# Altium PCB isp.PcbDoc
Units mil, origin at the board's own origin, x right, y up, seen from the top; angles counter-clockwise.
Board outline 1400 x 650 mil, 6 copper layers (Top, 2-GND, 3-SIG, 4-SIG, 5-GND, Bottom), stack 46.142 mil thick; 58 components, 58 nets, 288 pads, 146 vias.
Unrouted connection lines stored in the file: 4.
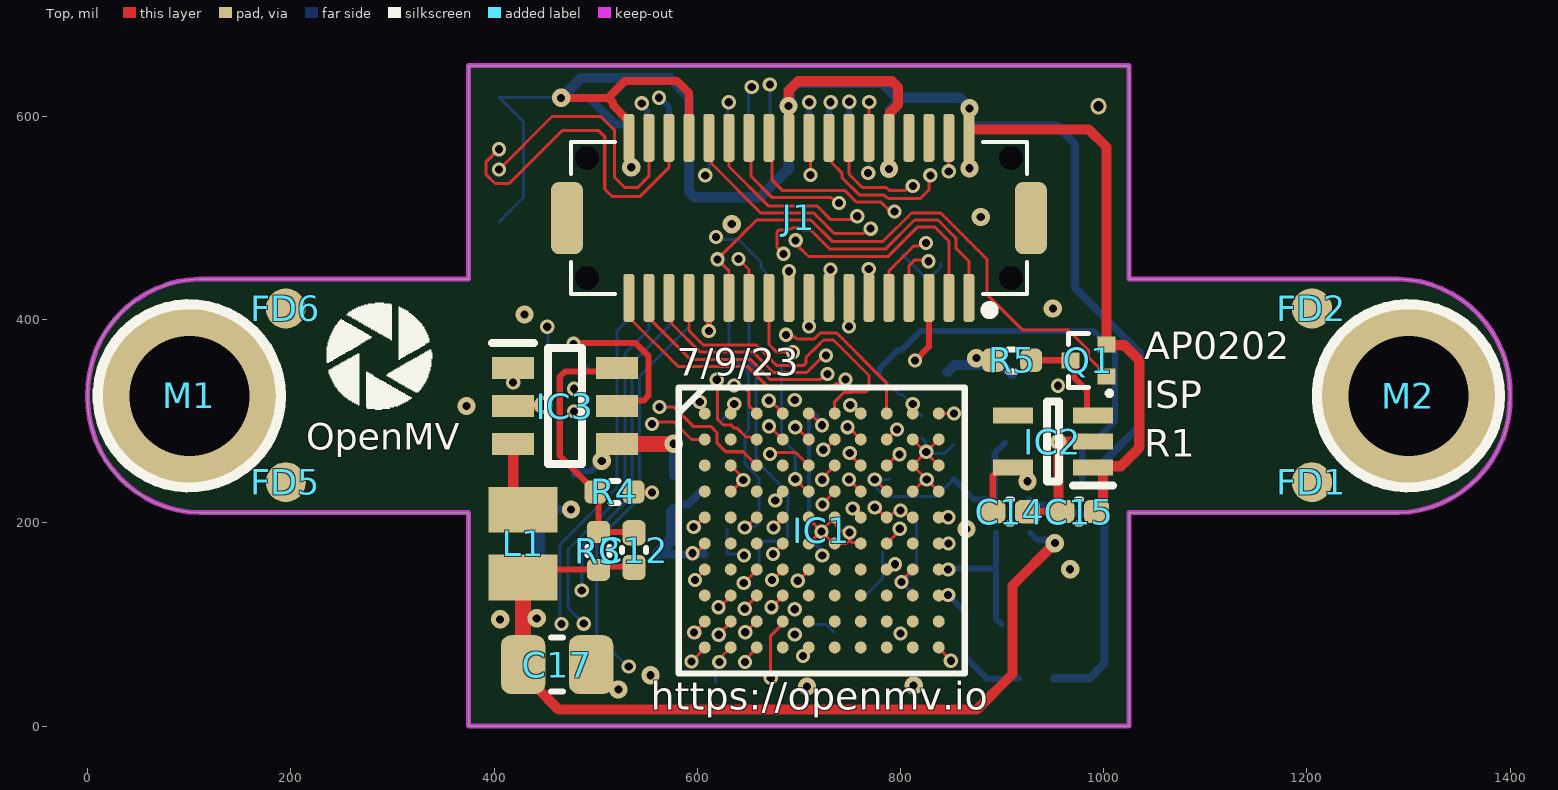
[diagram p0: Top view]
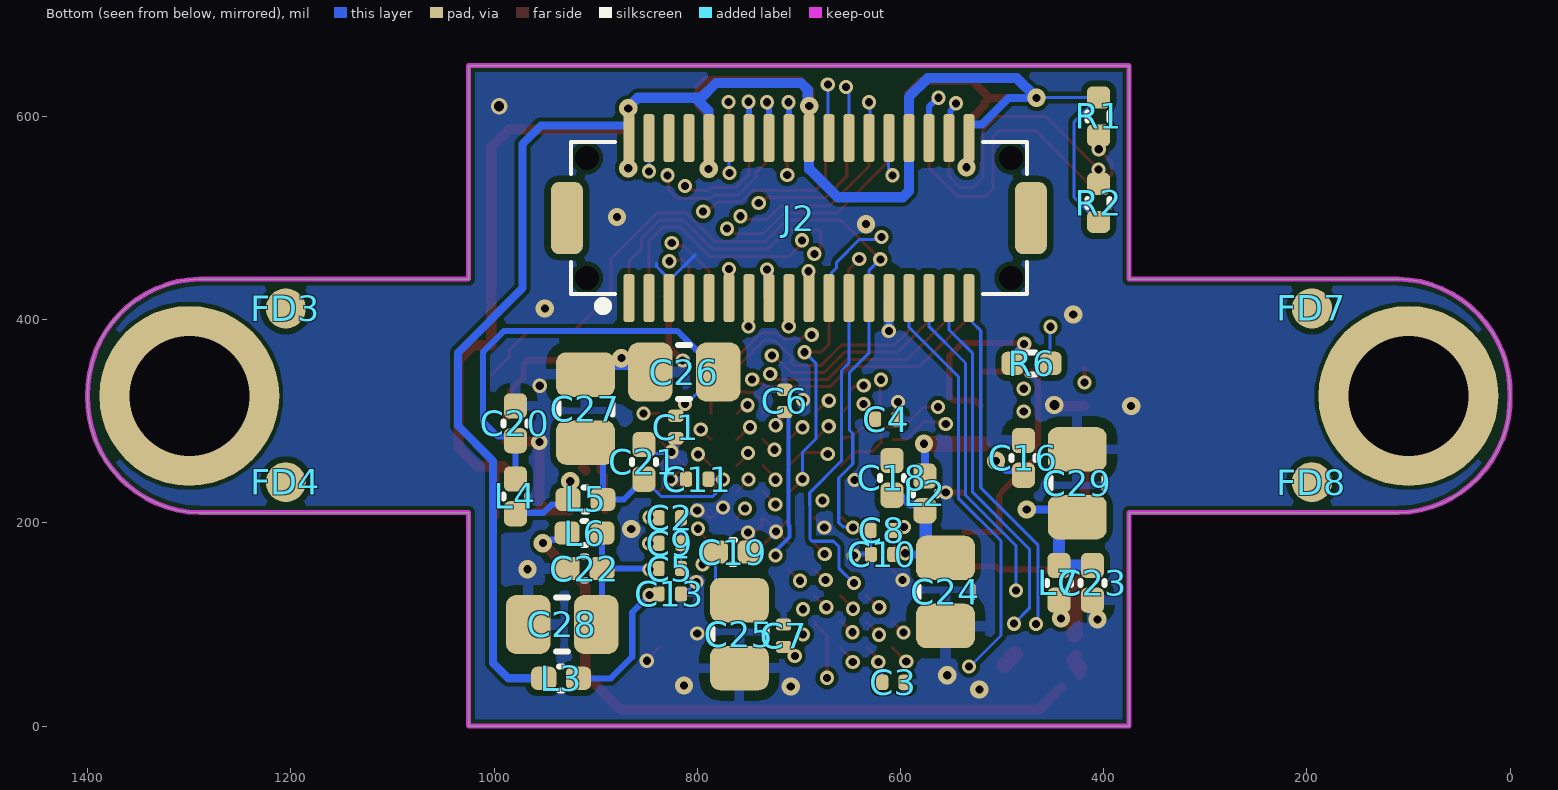
[diagram p1: Bottom view, seen from below]
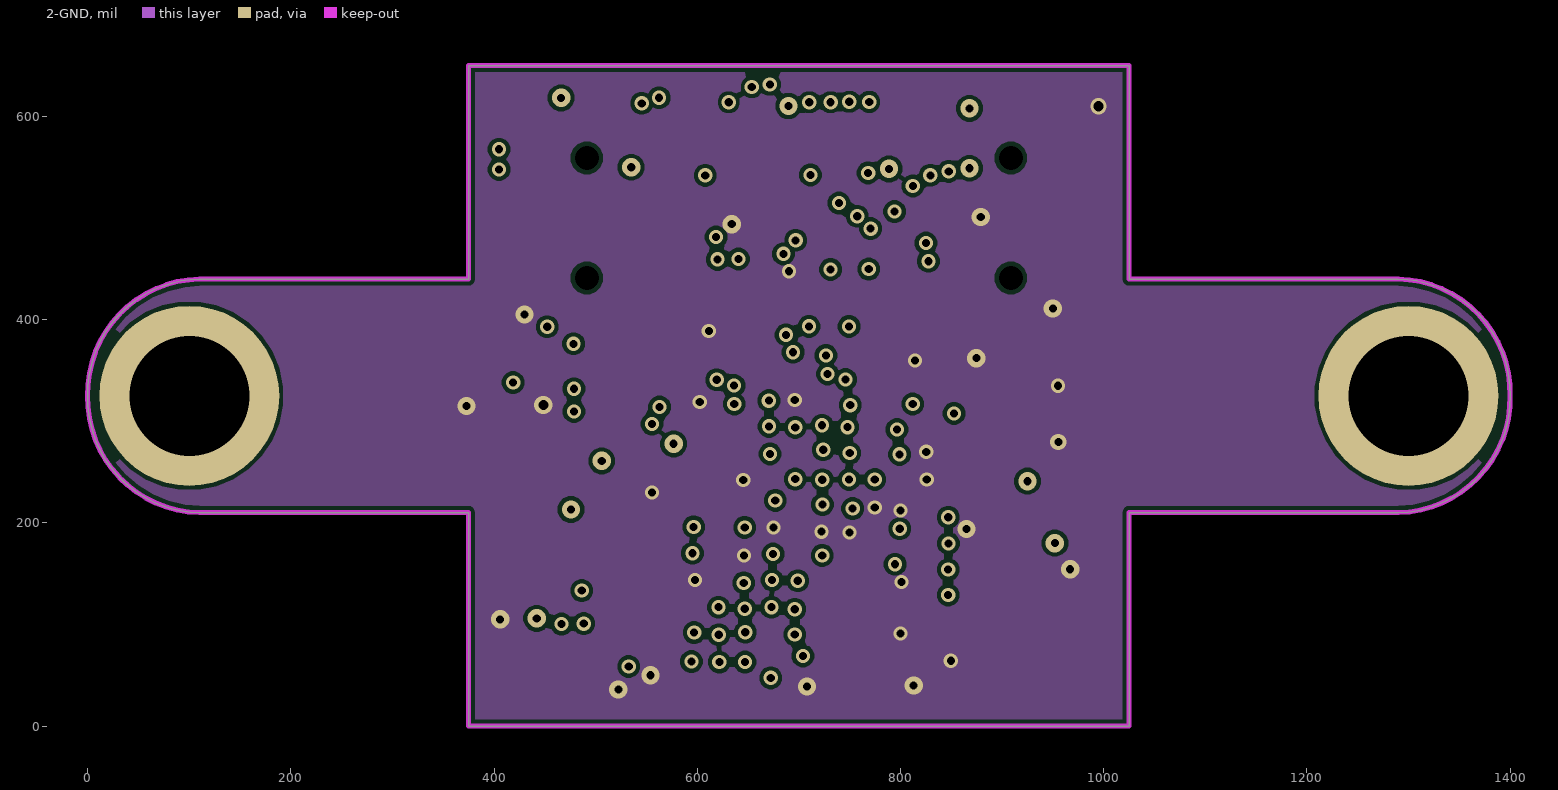
[diagram p2: 2-GND]
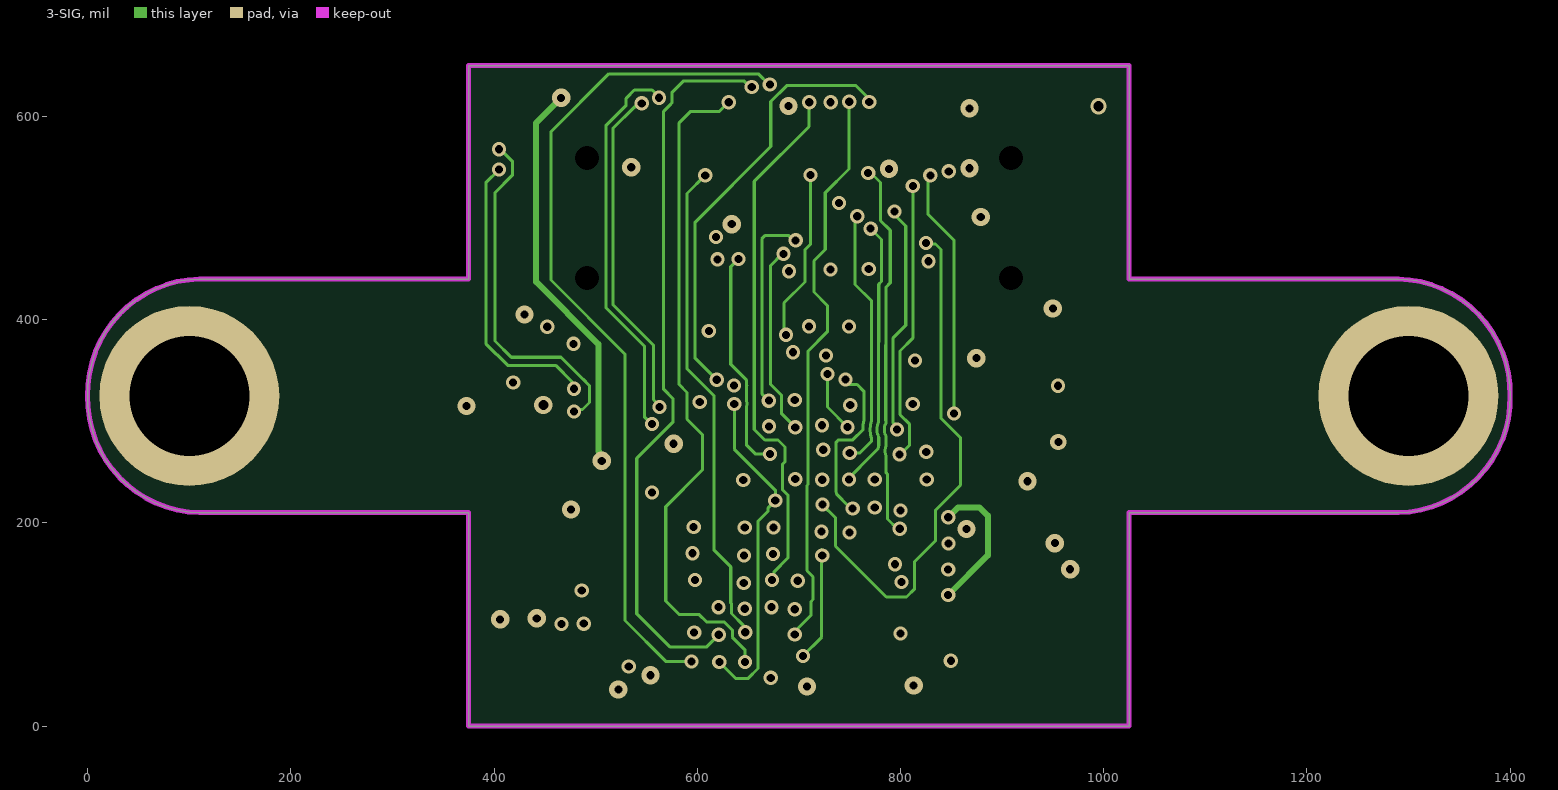
[diagram p3: 3-SIG]
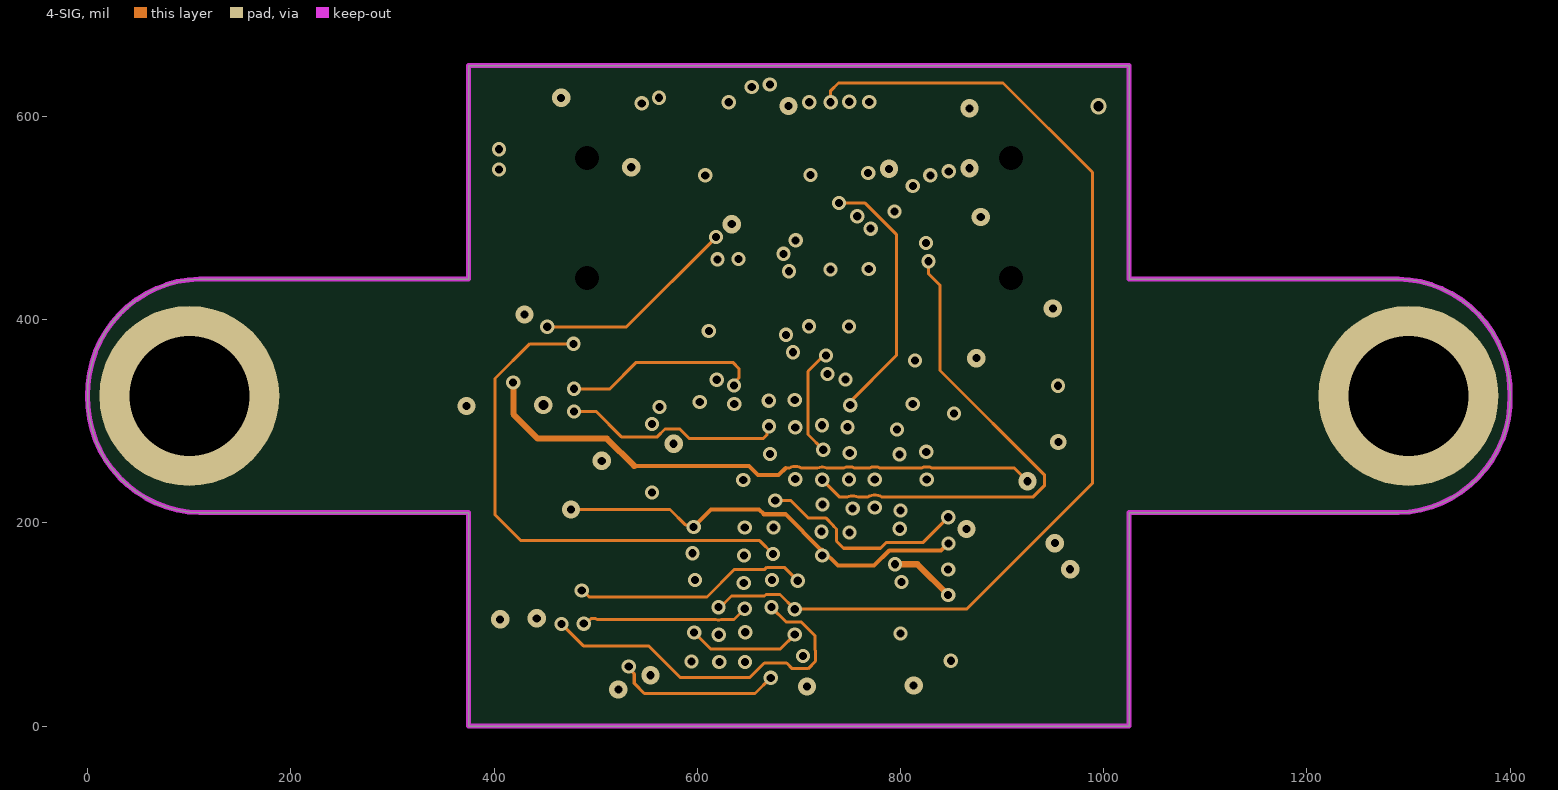
[diagram p4: 4-SIG]
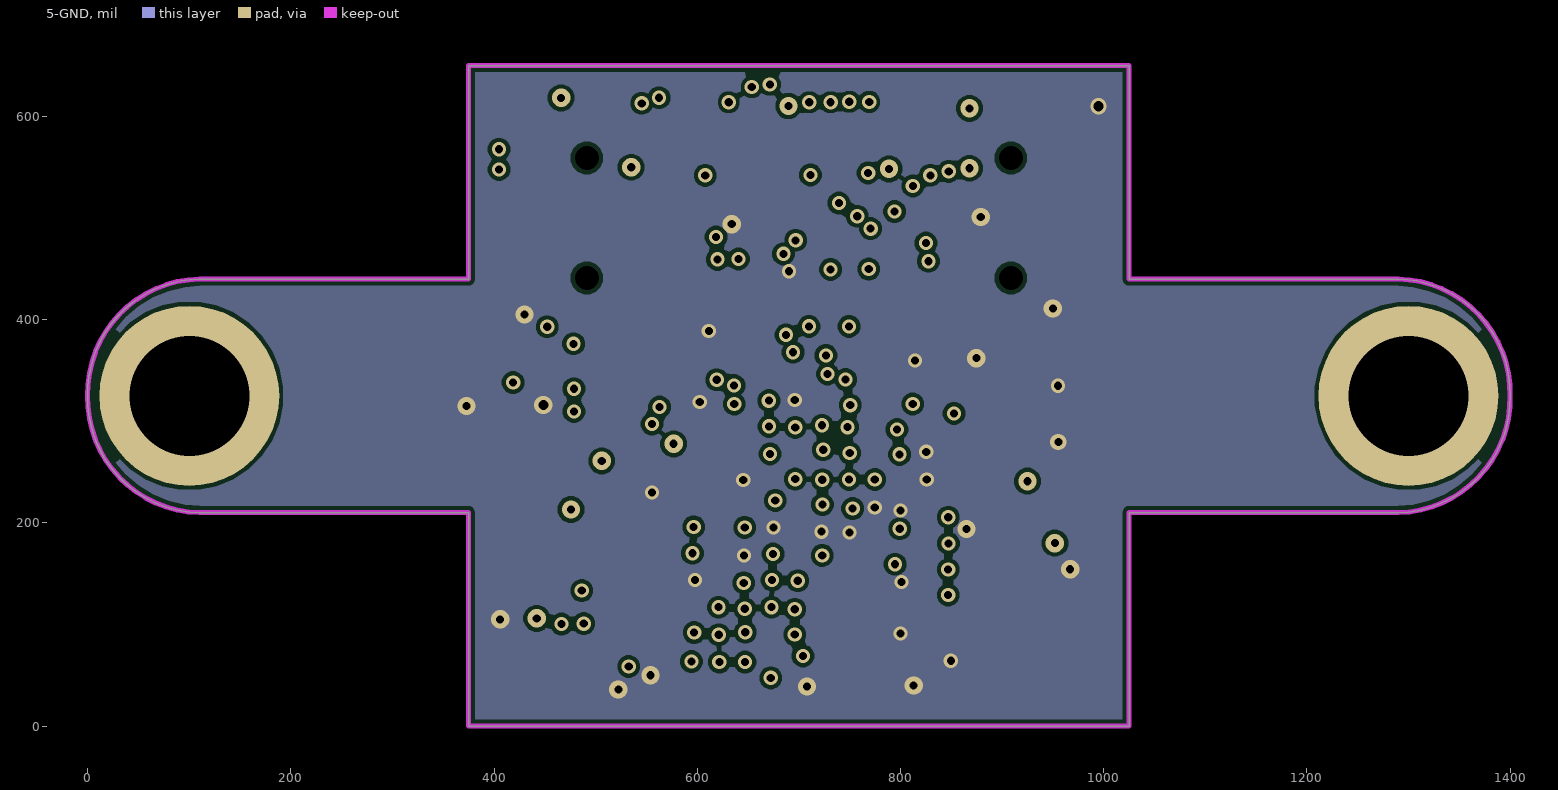
[diagram p5: 5-GND]
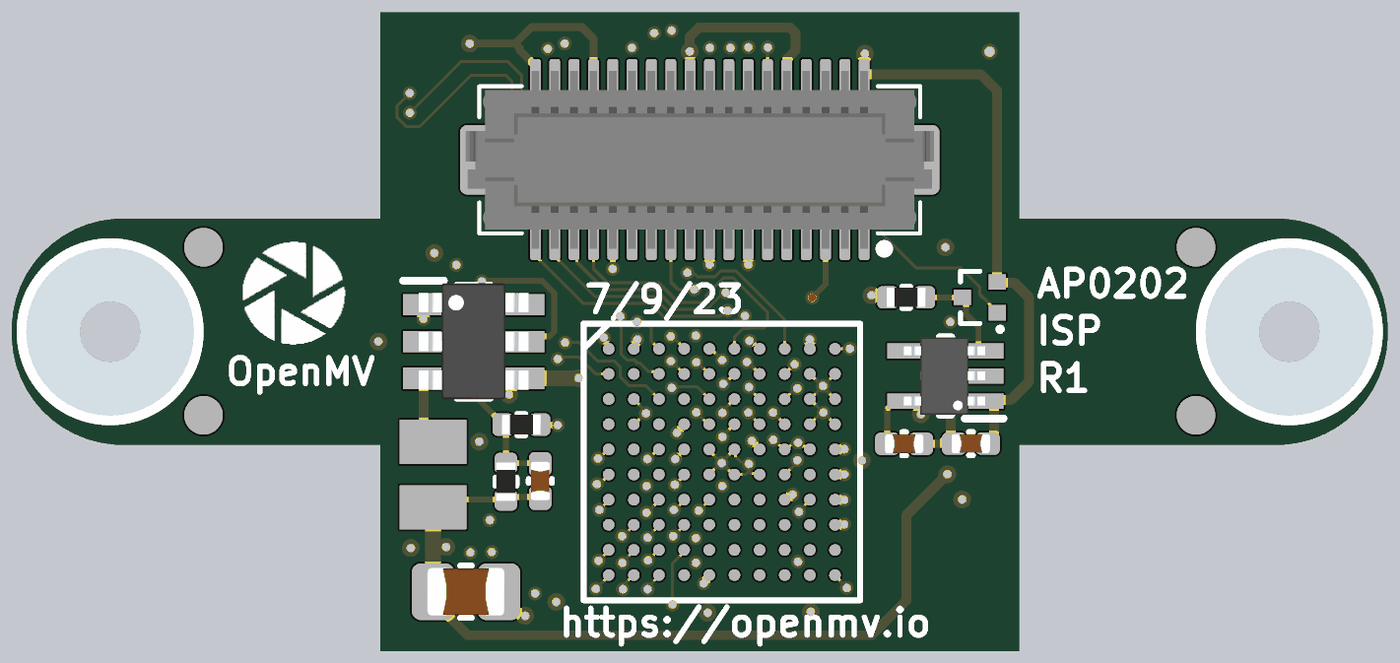
[diagram p6: 3D render of the assembled board from above, using the file's embedded part models]
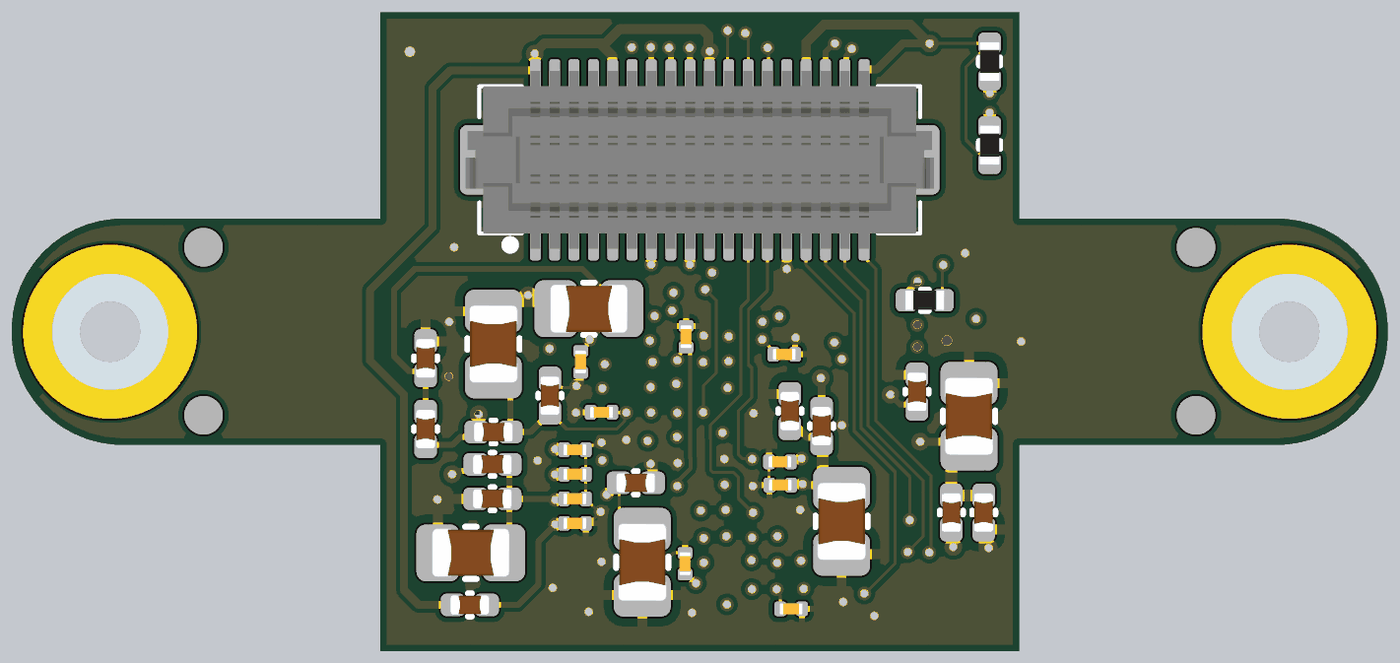
[diagram p7: 3D render of the assembled board from below, using the file's embedded part models]

## Layer stack, top to bottom
Top Solder: solder mask 0.4, Solder Resist, Dk 3.5
Top: signal copper 1.378
Dielectric 2: prepreg 5, PP-006, Dk 4.1
2-GND: signal copper 1.378
Dielectric 3: prepreg 10, PP-006, Dk 4.1
3-SIG: signal copper 1.378
Dielectric 1: dielectric 7.874, FR-4, Dk 4.8
4-SIG: signal copper 1.378
Dielectric 4: prepreg 10, PP-006, Dk 4.1
5-GND: signal copper 1.378
Dielectric 5: prepreg 5, PP-006, Dk 4.1
Bottom: signal copper 1.378
Bottom Solder: solder mask 0.4, Solder Resist, Dk 3.5

## Board outline
1290.03,210 1025.03,210 1025.03,0 375.03,0 375.03,210 110.03,210 cw(c112.53,322.5) 0.03,325 cw(c112.53,327.5) 110.03,440 375.03,440 375.03,650 1025.03,650 1025.03,440 1290.03,440 cw(c1287.53,327.5) 1400.03,325 cw(c1287.53,322.5)

## Design rules (kind name [scope] priority, off if disabled: settings)
BoardOutlineClearance mdCopperDimension [All] p1: gap=5 ignorepadtopadclearanceinfootprint=FALSE
Clearance [All] p1: gap=4 ignorepadtopadclearanceinfootprint=FALSE except(6: SMDPad-Fill SMDPad-Poly SMDPad-Region Fill-Fill Fill-Poly Fill-Region Poly-Poly Poly-Region Region-Region)
HoleSize HoleSize_For_NetClass_signal [InNetClass('signal')] p1: absolutevalues=TRUE maxlimit=4 minlimit=4 maxpercent=80.000 minpercent=20.000
HoleSize HoleSize_For_NetClass_pwr [InNetClass('pwr')] p2: absolutevalues=TRUE maxlimit=4 minlimit=4 maxpercent=80.000 minpercent=20.000
HoleSize HoleSize_For_NetClass_gnd [InNetClass('gnd')] p3: absolutevalues=TRUE maxlimit=4 minlimit=4 maxpercent=80.000 minpercent=20.000
HoleSize [All] p4: absolutevalues=TRUE maxlimit=100000 minlimit=4 maxpercent=80.000 minpercent=20.000
HoleToHoleClearance mdDrill [All] p1: gap=3 allowstackedmicrovias=TRUE
MinimumSolderMaskSliver [All] p1 off: minsoldermaskwidth=10
PasteMaskExpansion Expansion_SMDPaste_OFF [InPadClass('SMDPaste_OFF')] p1: expansion=0
PasteMaskExpansion mlMinCreamFrame [All] p2: expansion=0
PolygonConnect PolygonConnect_1 [HasFootprint('C0201')] p1: thpad.connectstyle=Relief thpad.reliefconductorwidth=10 thpad.reliefentries=4 thpad.polygonreliefangle="90 Angle" thpad.airgapwidth=10 smdpad.connectstyle=Relief smdpad.reliefconductorwidth=6 smdpad.reliefentries=4 smdpad.polygonreliefangle="90 Angle" smdpad.airgapwidth=6 via.connectstyle=Direct via.reliefconductorwidth=10 via.reliefentries=4 via.polygonreliefangle="90 Angle" via.airgapwidth=10
PolygonConnect [All] p2: thpad.connectstyle=Relief thpad.reliefconductorwidth=10 thpad.reliefentries=4 thpad.polygonreliefangle="90 Angle" thpad.airgapwidth=10 smdpad.connectstyle=Relief smdpad.reliefconductorwidth=10 smdpad.reliefentries=4 smdpad.polygonreliefangle="90 Angle" smdpad.airgapwidth=10 via.connectstyle=Direct via.reliefconductorwidth=10 via.reliefentries=4 via.polygonreliefangle="90 Angle" via.airgapwidth=10
RoutingVias [All] p1: holewidth=8 width=14 viastyle="Through Hole" minholewidth=8 minwidth=14 maxholewidth=100 maxwidth=100
SolderMaskExpansion mlMinStopFrame [All] p1: expansion=2 istentingtop=FALSE
Width [All] p1: maxlimit=100 minlimit=3 preferedwidth=3
26 further rules are at their usual default settings.

## Classes and differential pairs
pad class SMDPaste_OFF: FD1-1 FD2-1 FD3-1 FD4-1 FD5-1 FD6-1 FD7-1 FD8-1 J1-1 J1-2 J1-3 J1-4 J1-5 J1-6 J1-7 J1-8 J1-9 J1-10 J1-11 J1-12 J1-13 J1-14 J1-15 J1-16 J1-17 J1-18 J1-19 J1-20 J1-21 J1-22 J1-23 J1-24 J1-25 J1-26 J1-27 J1-28 J1-29 J1-30 J1-31 J1-32 J1-33 J1-34 J1-35 J1-36 J2-1 J2-2 J2-3 J2-4 J2-5 J2-6 J2-7 J2-8 J2-9 J2-10 J2-11 J2-12 J2-13 J2-14 J2-15 J2-16 J2-17 J2-18 J2-19 J2-20 J2-21 J2-22 J2-23 J2-24 J2-25 J2-26 J2-27 J2-28 J2-29 J2-30 J2-31 J2-32 J2-33 J2-34 J2-35 J2-36

## Components (designator, comment, footprint, x,y, rotation, side; value= is the part's Value field where it differs from the comment)
C1 "0.22uF" C0201 821.18,294.33 r90 bottom
C2 "0.22uF" C0201 827.03,205 r0 bottom
C3 "0.22uF" C0201 607,43 r0 bottom
C4 "0.22uF" C0201 614,302 r0 bottom
C5 "0.22uF" C0201 827.03,155 r0 bottom
C6 "0.22uF" C0201 714,320 r270 bottom
C7 "0.22uF" C0201 715.02,88.94 r270 bottom
C8 "0.22uF" C0201 618.46,192.6 r180 bottom
C9 "0.22uF" C0201 827.03,180 r0 bottom
C10 "0.22uF" C0201 618.08,168.97 r180 bottom
C11 "0.22uF" C0201 800,243 r180 bottom
C12 "6.8pF" 0402 537.75,173.12 r90 top
C13 "0.22uF" C0201 827.03,130 r0 bottom
C14 "4.7uF" 0402 908,211 r180 top
C15 "4.7uF" 0402 975.97,211.13 r0 top
C16 "4.7uF" 0402 479,264 r270 bottom
C17 "22uF" 0805 462.1,60.44 r180 top
C18 "4.7uF" 0402 608.3,244.31 r270 bottom
C19 "4.7uF" 0402 765.09,171.26 r0 bottom
C20 "4.7uF" 0402 979,298 r270 bottom
C21 "4.7uF" 0402 852.53,260 r270 bottom
C22 "4.7uF" 0402 911,155 r180 bottom
C23 "4.7uF" 0402 411,141 r90 bottom
C24 "22uF" 0805 555.66,132.02 r90 bottom
C25 "22uF" 0805 758.53,90.48 r90 bottom
C26 "22uF" 0805 812.85,348.46 r180 bottom
C27 "22uF" 0805 910.03,312.5 r270 bottom
C28 "22uF" 0805 933,100 r180 bottom
C29 "22uF" 0805 426,239 r270 bottom
FD1 "FIDUCIAL1X2" FIDUCIAL-1X2 1205.03,240 r0 top
FD2 "FIDUCIAL1X2" FIDUCIAL-1X2 1205.03,411 r0 top
FD3 "FIDUCIAL1X2" FIDUCIAL-1X2 1205.03,411 r180 bottom
FD4 "FIDUCIAL1X2" FIDUCIAL-1X2 1205.03,240 r180 bottom
FD5 "FIDUCIAL1X2" FIDUCIAL-1X2 195.03,240 r0 top
FD6 "FIDUCIAL1X2" FIDUCIAL-1X2 195.03,411 r0 top
FD7 "FIDUCIAL1X2" FIDUCIAL-1X2 195.03,411 r180 bottom
FD8 "FIDUCIAL1X2" FIDUCIAL-1X2 195.03,240 r180 bottom
IC1 "AP0202AT2L00XPGA0" AP0202AT2L00XPGA0 722.53,192.5 r0 top locked
IC2 "MIC5365-2.8YC5-TR" SOT65P210X110-5N 950.03,280 r180 top
IC3 "TLV62568PDDCR" SOT95P280X110-6N 470.03,315 r0 top
J1 "DF12NB(3.0)-36DS-0.5V(51)" DF12-36-DS 700.03,500 r0 top locked
J2 "DF12-36-DP" DF12-36-DP 700.03,500 r0 bottom locked
L1 "MAKK2016T2R2M" INDC2016X100N 428.62,179.59 r90 top
L2 "100" 0402 576,229 r90 bottom
L3 "100" 0402 934,47 r0 bottom
L4 "100" 0402 979,226 r270 bottom
L5 "100" 0402 910,223 r0 bottom
L6 "100" 0402 911,190 r0 bottom
L7 "100" 0402 444,141 r270 bottom
M1 "9774030151R" 9774030243R 100.03,325 r0 top
M2 "9774030151R" 9774030243R 1300.03,325 r0 top
Q1 "SSM3J15FV,L3F" SSM3J15FV 985.03,360 r90 top
R1 "1.5K" R0402 405.03,600 r90 bottom
R2 "1.5K" R0402 405.03,515 r270 bottom
R3 "100K" R0402 502.8,172.46 r270 top
R4 "100K" R0402 518.52,230.5 r0 top
R5 "100K" R0402 910.03,360 r180 top
R6 "10K" R0402 471,357 r180 bottom

## Footprints (in the part's own frame and the unit in brackets; to place one, negate y for a bottom-side part, rotate by r counter-clockwise, add the part's x,y. Pads: shape width x height; smd on the part's side, far side on the other; paste and mask are expansions set on the pad)
0402 [mm] "Chip Capacitor, 2-Leads, Body  0402 (in) 1005 (mm), IPC Medium Density"
  rrect52% 0.63x0.58 smd mask+0.05: 1(-0.435,0) 2(0.435,0)
  silkscreen extent -0.05,-0.3 0.05,0.3, body extent -0.5,-0.25 0.5,0.25, height 0.5
0805 [mm] "Chip Capacitor, Body 0805 imperial, 2.0x1.2mm, IPC Medium Density"
  rrect45% 1.11x1.47 smd: 1(-0.85,0) 2(0.85,0)
  silkscreen extent -0.15,-0.67 0.15,0.67, body extent -1,-0.62 1,0.63, height 1.25
9774030243R [mm] "Round Standoff Threaded M2x0.4 Steel 0.118\" (3.00mm)"
  round 4.5 hole 3 unplated mask+0.05: 1(0,0)
  body extent -2.17,-2.17 2.18,2.17, height 3.01
AP0202AT2L00XPGA0 [mil] "AP0202AT2L00XPGA0"
  rrect100% 11.81x11.81 smd: P$1(-115.16,115.16) P$2(-89.57,115.16) P$3(-63.98,115.16) P$4(-38.39,115.16) P$5(-12.8,115.16) P$6(12.8,115.16) P$7(38.39,115.16) P$8(63.98,115.16) P$9(89.57,115.16) P$10(115.16,115.16) P$11(-115.16,89.57) P$12(-89.57,89.57) P$13(-63.98,89.57) P$14(-38.39,89.57) P$15(-12.8,89.57) P$16(12.8,89.57) P$17(38.39,89.57) P$18(63.98,89.57) P$19(89.57,89.57) P$20(115.16,89.57) P$21(-115.16,63.98) P$22(-89.57,63.98) P$23(-63.98,63.98) P$24(-38.39,63.98) P$25(-12.8,63.98) P$26(12.8,63.98) P$27(38.39,63.98) P$28(63.98,63.98) P$29(89.57,63.98) P$30(115.16,63.98) P$31(-115.16,38.39) P$32(-89.57,38.39) P$33(-63.98,38.39) P$34(-38.39,38.39) P$35(-12.8,38.39) P$36(12.8,38.39) P$37(38.39,38.39) P$38(63.98,38.39) P$39(89.57,38.39) P$40(115.16,38.39) P$41(-115.16,12.8) P$42(-89.57,12.8) P$43(-63.98,12.8) P$44(-38.39,12.8) P$45(-12.8,12.8) P$46(12.8,12.8) P$47(38.39,12.8) P$48(63.98,12.8) P$49(89.57,12.8) P$50(115.16,12.8) P$51(-115.16,-12.8) P$52(-89.57,-12.8) P$53(-63.98,-12.8) P$54(-38.39,-12.8) P$55(-12.8,-12.8) P$56(12.8,-12.8) P$57(38.39,-12.8) P$58(63.98,-12.8) P$59(89.57,-12.8) P$60(115.16,-12.8) P$61(-115.16,-38.39) P$62(-89.57,-38.39) P$63(-63.98,-38.39) P$64(-38.39,-38.39) P$65(-12.8,-38.39) P$66(12.8,-38.39) P$67(38.39,-38.39) P$68(63.98,-38.39) P$69(89.57,-38.39) P$70(115.16,-38.39) P$71(-115.16,-63.98) P$72(-89.57,-63.98) P$73(-63.98,-63.98) P$74(-38.39,-63.98) P$75(-12.8,-63.98) P$76(12.8,-63.98) P$77(38.39,-63.98) P$78(63.98,-63.98) P$79(89.57,-63.98) P$80(115.16,-63.98) P$81(-115.16,-89.57) P$82(-89.57,-89.57) P$83(-63.98,-89.57) P$84(-38.39,-89.57) P$85(-12.8,-89.57) P$86(12.8,-89.57) P$87(38.39,-89.57) P$88(63.98,-89.57) P$89(89.57,-89.57) P$90(115.16,-89.57) P$91(-115.16,-115.16) P$92(-89.57,-115.16) P$93(-63.98,-115.16) P$94(-38.39,-115.16) P$95(-12.8,-115.16) P$96(12.8,-115.16) P$97(38.39,-115.16) P$98(63.98,-115.16) P$99(89.57,-115.16) P$100(115.16,-115.16)
  silkscreen extent -141,-141 141,141, body extent -142,-142 142,142, height 39
C0201 [mil] "0201 IPC-7351"
  rrect50% 12x15 smd mask+1.97: 1(-11,0) 2(11,0)
  body extent -12,-6 12,6, height 14
DF12-36-DP [mm] "36 Position Connector Receptacle, Center Strip Contacts Surface Mount Gold"
  rrect50% 0.8x1.8 smd mask+0.05: 0(-5.8,0) 0(5.8,0)
  rrect50% 0.28x1.2 smd mask+0.05: 1(4.25,2) 2(4.25,-2) 3(3.75,2) 4(3.75,-2) 5(3.25,2) 6(3.25,-2) 7(2.75,2) 8(2.75,-2) 9(2.25,2) 10(2.25,-2) 11(1.75,2) 12(1.75,-2) 13(1.25,2) 14(1.25,-2) 15(0.75,2) 16(0.75,-2) 17(0.25,2) 18(0.25,-2) 19(-0.25,2) 20(-0.25,-2) 21(-0.75,2) 22(-0.75,-2) 23(-1.25,2) 24(-1.25,-2) 25(-1.75,2) 26(-1.75,-2) 27(-2.25,2) 28(-2.25,-2) 29(-2.75,2) 30(-2.75,-2) 31(-3.25,2) 32(-3.25,-2) 33(-3.75,2) 34(-3.75,-2) 35(-4.25,2) 36(-4.25,-2)
  round 0 hole 0.6 unplated: MH1(-5.3,-1.5) MH2(5.3,-1.5)
  silkscreen extent -5.7,-1.9 5.7,2.3, body extent -6.05,-2.3 6.05,2.3, height 2.3
DF12-36-DS [mm] "36 Position Connector Receptacle, Center Strip Contacts Surface Mount Gold"
  rrect50% 0.8x1.8 smd mask+0.05: 0(-5.8,0) 0(5.8,0)
  rrect50% 0.28x1.2 smd mask+0.05: 1(4.252,-1.993) 2(4.252,2.007) 3(3.752,-1.993) 4(3.752,2.007) 5(3.252,-1.993) 6(3.252,2.007) 7(2.752,-1.993) 8(2.752,2.007) 9(2.252,-1.993) 10(2.252,2.007) 11(1.752,-1.993) 12(1.752,2.007) 13(1.252,-1.993) 14(1.252,2.007) 15(0.752,-1.993) 16(0.752,2.007) 17(0.252,-1.993) 18(0.252,2.007) 19(-0.248,-1.993) 20(-0.248,2.007) 21(-0.748,-1.993) 22(-0.748,2.007) 23(-1.248,-1.993) 24(-1.248,2.007) 25(-1.748,-1.993) 26(-1.748,2.007) 27(-2.248,-1.993) 28(-2.248,2.007) 29(-2.748,-1.993) 30(-2.748,2.007) 31(-3.248,-1.993) 32(-3.248,2.007) 33(-3.748,-1.993) 34(-3.748,2.007) 35(-4.248,-1.993) 36(-4.248,2.007)
  round 0 hole 0.6 unplated: MH1(-5.3,-1.5) MH2(5.3,-1.5)
  silkscreen extent -5.7,-2.4 5.7,1.9, body extent -6.05,-2.3 6.05,2.3, height 2.7
FIDUCIAL-1X2 [mm] "FIDUCIAL-1X2"
  rrect100% 1x1 smd paste+0: 1(0,0)
INDC2016X100N [mm] "INDC2016X100N"
  rect 1.14x1.73 smd: 1(-0.847,0) 2(0.847,0)
  body extent -1,-0.8 1,0.8, height 1
R0402 [mm] "Chip Resistor, 2-Leads, Body  0402 (in) 1005 (mm), IPC Medium Density"
  rrect51% 0.55x0.58 smd mask+0.05: 1(-0.475,0) 2(0.475,0)
  silkscreen extent -0.1,-0.28 0.1,0.28, body extent -0.5,-0.25 0.5,0.25, height 0.34
SOT65P210X110-5N [mm] "SOT65P210X110-5N"
  rect 1x0.4 smd: 1(-1,0.65) 2(-1,0) 3(-1,-0.65) 4(1,-0.65) 5(1,0.65)
  silkscreen extent -1.5,-1 0.15,1.1, body extent -1.02,-1 1.07,1, height 0.96
SOT95P280X110-6N [mil] "SOT95P280X100-6N"
  rect 41.34x21.65 smd: 1(-51.18,37.4) 2(-51.18,0) 3(-51.18,-37.4) 4(51.18,-37.4) 5(51.18,0) 6(51.18,37.4)
  silkscreen extent -72,-57 17,62, body extent -56,-59 56,59, height 44
SSM3J15FV [mm]
  rect 0.4x0.45 smd: 1(-0.4,-0.45) 2(0.4,-0.45) 3(0,0.45)
  silkscreen extent -0.88,-0.58 0.67,0.5, body extent -0.6,-0.6 0.6,0.6, height 0.6

## Part data
C1 C2 C3 C4 C5 C6 C7 C8 C9 C10 C11 C13: library part C-EUC0201, "CAPACITOR, European symbol", MPN=GRM033R60J224ME15D, DeviceName=C0201, DeviceSetName=C-EU, GateName_1=G$1, LibraryName=rcl, POPULARITY=0, SPICEPREFIX=C, SymbolName_1=C-EU
C12: library part CAP_0402, "0402 (1005 Metric) Nick Garner - TeleSense", MPN=GRM1555C1H6R8DA01D, DeviceSetName=CAP_0402, GateName_1=G$1, LibraryName=0402, SymbolName_1=CAP
C14 C15 C16 C18 C19 C20 C21 C22 C23: library part CAP_0402, "0402 (1005 Metric) Nick Garner - TeleSense", MPN=JMK105BBJ475MV-F, DeviceSetName=CAP_0402, GateName_1=G$1, LibraryName=0402, SymbolName_1=CAP
C17 C24 C25 C26 C27 C28 C29: library part 22UF-0805-6.3V-20%, "22ÂµF ceramic capacitors    A capacitor is a passive two-terminal electrical component used to store electrical energy temporarily in an electric field.", MPN=CL21A226MQQNNNE, DeviceName=-0805-6.3V-20%, DeviceSetName=22UF, GateName_1=G$1, LibraryName=SparkFun-Capacitors, PROD_ID=CAP-08402, SymbolName_1=CAP
FD1 FD2 FD3 FD4 FD5 FD6 FD7 FD8: "Fiducial Alignment Points    Point-of-reference for pick-and-place machines and other optical instruments.", DeviceName=1X2, DeviceSetName=FIDUCIAL, GateName_1=G$1, LibraryName=SparkFun-Aesthetics, SymbolName_1=FIDUCIAL
IC1: MPN=AP0202AT2L00XPGA0-DR, DeviceSetName=AP0202AT2L00XPGA0, GateName_1=G$1, LibraryName=AP0202AT2L00XPGA0, SymbolName_1=AP0202AT2L00XPGA0
IC2: "IC REG LINEAR 2.8V 150MA SC70-5   Source:  Datasheet", MANUFACTURER_NAME=Microchip, DeviceSetName=MIC5365-2.8YC5-TR, GateName_1=G$1, HEIGHT=1.1mm, LibraryName=MIC5365-2.8YC5-TR, MANUFACTURER_PART_NUMBER=MIC5365-2.8YC5-TR, MOUSER_PART_NUMBER=998-MIC5365-2.8YC5TR, MOUSER_PRICE-STOCK=https://www.mouser.co.uk/ProductDetail/Microchip-Technology-Atmel/MIC5365-2.8YC5-TR?qs=U6T8BxXiZAX3mJDSWJyjVA%3D%3D, MPN=MIC5365-2.8YC5-TR, SymbolName_1=MIC5365-2.8YC5-TR
IC3: "2.5V-5.5V input, 1A high efficiency step-down buck converter in SOT23 and SOT563 package   Source:  Datasheet", MANUFACTURER_NAME="Texas Instruments", DeviceSetName=TLV62568PDDCR, GateName_1=G$1, HEIGHT=1.1mm, LibraryName=TLV62568PDDCR, MANUFACTURER_PART_NUMBER=TLV62568PDDCR, MOUSER_PART_NUMBER=595-TLV62568PDDCR, MOUSER_PRICE-STOCK=https://www.mouser.co.uk/ProductDetail/Texas-Instruments/TLV62568PDDCR?qs=1mbolxNpo8f1FPchIXcxyQ%3D%3D, MPN=TLV62568PDDCR, SymbolName_1=TLV62568PDDCR
J1: library part DF12-36-DS, DeviceSetName=DF12-36-DS, GateName_1=G$1, LibraryName=DF12-36-DS, MPN=DF12NB(3.0)-36DS-0.5V(51), SymbolName_1=DF12-36
J2: MPN=DF12NB(3.0)-36DP-0.5V(51), DeviceSetName=DF12-36-DP, GateName_1=G$1, LibraryName=DF12NB(3.0)-36DP-0.5V(51), SymbolName_1=DF12-36
L1: "INDUCTOR, METAL CORE Check availability", PACKAGE="2016 Taiyo Yuden", AVAILABILITY="In Stock", DeviceSetName=MAKK2016T2R2M, GateName_1=G$1, LibraryName=MAKK2016T2R2M, MF="Taiyo Yuden", MP=MAKK2016T2R2M, MPN=MAKK2016T2R2M, PRICE=None, PURCHASE-URL=https://pricing.snapeda.com/search/part/MAKK2016T2R2M/?ref=eda, SymbolName_1=MAKK2016T2R2M
L2 L3 L4 L5 L6 L7: library part INDUCTOR_0402, MPN=MFBM1V1005-101-R, DeviceSetName=INDUCTOR_0402, GateName_1=G$1, LibraryName=0402, SymbolName_1=INDUCTOR
Q1: library part PMXB120EPEZ, "MOSFET 30 V, P-channel Trench MOSFET   Source:  Datasheet", DeviceSetName=SSM3J15FV,L3F, GateName_1=G$1, HEIGHT=0.4mm, LibraryName=SSM3J15FV,L3F, MANUFACTURER_PART_NUMBER=SSM3J15FV,L3F, MPN=SSM3J15FV,L3F, SymbolName_1=SSM3J15FV,L3F
R1 R2: library part R-US_R0402, "RESISTOR, American symbol", MPN=RC0402FR-131K5L, DeviceName=R0402, DeviceSetName=R-US_, GateName_1=G$1, LibraryName=rcl, POPULARITY=34, SPICEPREFIX=R, SymbolName_1=R-US
R3 R4 R5: library part R-US_R0402, "RESISTOR, American symbol", MPN=AC0402FR-07100KL, DeviceName=R0402, DeviceSetName=R-US_, GateName_1=G$1, LibraryName=rcl, POPULARITY=34, SPICEPREFIX=R, SymbolName_1=R-US
R6: library part R-US_R0402, "RESISTOR, American symbol", MPN=AC0402FR-1310KL, DeviceName=R0402, DeviceSetName=R-US_, GateName_1=G$1, LibraryName=rcl, POPULARITY=34, SPICEPREFIX=R, SymbolName_1=R-US
M1 M2: DeviceSetName=9774030151R, GateName_1=G$1, LibraryName=9774030151R, MPN=9774030151R, SymbolName_1=9774030151R

## Via types
v1: diameter 14, hole 8, Top to Bottom, tented both sides, 118 vias
v2: diameter 18, hole 8, Top to Bottom, tented both sides, 25 vias
v3: diameter 16, hole 8, Top to Bottom, tented both sides, 1 vias
v4: diameter 18, hole 10, Top to Bottom, tented both sides, 1 vias
v5: diameter 16, hole 10, Top to Bottom, tented both sides, 1 vias

## Nets (pads, with @x,y where several pads share a name; then routed paths per layer and width w, separated by ;. In a path a pad name is that pad's centre, name@x,y a point inside that pad or via, vN(x,y) a via of type N, cw(c..) or ccw(c..) an arc to the next point about the centre after c; other vN are vias at no path point)
DCMI_CLK: IC1.P$58 J2.12 | length 425.2
  Top w3: IC1.P$58 799.3,192.5 v1(799.3,194.25)
  3-SIG w3: v1(768.24,544.4) 771.13,544.4 780.47,535.06 780.47,497.46 789.99,487.93 789.99,436.23 785.95,432.19 785.95,385.1 785.89,385.04 785.89,375.31 785.56,374.98 785.56,300.75 785.89,300.42 785.89,298.33 ccw(c796.58,291.85) 785.95,285.26 785.95,275.76 ccw(c797.41,270.77) 785.95,265.78 785.95,249.17 787.26,247.86 787.26,203.84 796.85,194.25 v1(799.3,194.25)
  Bottom w3: v1(768.24,544.4) 768.93,545.08 J2.12
DCMI_D0: IC1.P$65 J2.31 | length 574.3
  Top w3: v1@698,141 698,141.79 IC1.P$65@710.14,153.93
  4-SIG w3: v1(486.35,133.3) 487.3,133.3 493.6,127 609.53,127 636.77,154.23 666.5,154.23 668.49,156.22 685.78,156.22 v1(699,143)
  Bottom w3: v1(486.35,133.3) 486.35,177.45 536,227.1 536,357.3 572.08,393.38 J2.31
DCMI_D1: IC1.P$84 J2.29 | length 638.1
  Top w3: v1(672.38,47.46) 672.23,47.61 672.23,88.91 684.14,100.82 IC1.P$84
  4-SIG w3: v1(532.56,58.64) 532.56,56.82 538,51.38 538,42 548,32 656.92,32 v1(672.38,47.46)
  Bottom w3: v1(532.56,58.64) 531.57,58.64 501.09,89.12 501.09,182.29 543,224.2 543,344.09 591.76,392.85 J2.29
DCMI_D2: IC1.P$74 J2.35 | length 729.4
  Top w3: v1@672.62,116.41 IC1.P$74@684.55,128.34
  4-SIG w3: v1(466.54,100.33) 487.87,79 552,79 583,48 652,48 666,62 688,62 693.5,56.5 709.18,56.5 716.5,63.82 716.5,74.18 716,74.68 716,89 702.5,102.5 687.5,102.5 v1(673,117)
  Bottom w3: v1(466.54,100.33) 464.82,102.05 464.82,178.42 521,234.6 521,389 529.66,397.66 529.66,418.21 J2.35
DCMI_D3: IC1.P$83 J2.28 | length 525.1
  Top w3: v1(647.32,92.36) 647.65,92.36 658.22,102.93 IC1.P$83
  3-SIG w3: v1(607.9,542.05) 590,524.15 590,351.65 616.34,325.31 616.34,173.43 633,156.77 633,121.32 633.73,120.59 633.73,110.82 645.22,99.34 645.22,94.46 v1(647.32,92.36)
  Bottom w3: v1(607.9,542.05) 607.9,545.02 611.73,548.85 J2.28@611.73,569.08
DCMI_D4: IC1.P$93 J2.26 | length 724.2
  Top w3: v1@646.82,64.23 646.82,65.02 IC1.P$93@658.96,77.16
  3-SIG w3: v1(631,614) 622.01,605.01 593.48,605.01 582.19,593.73 582.19,336.18 590,328.37 590,302 605,287 605,252 569,216 569,123 582,110 601.58,110 609.26,102.32 626.68,102.32 634.53,94.47 634.53,87.47 646.82,75.18 v1@646.82,64.23
  Bottom w3: J2.26@629.89,572.33 v1@629.89,613.64
  other v1: 647,63
DCMI_D5: IC1.P$73 J2.33 | length 542.2
  Top w3: v1@647.03,116.41 IC1.P$73@658.96,128.34
  4-SIG w3: v1(488.32,100.8) 490.45,100.8 495.58,105.93 500.08,105.93 501.23,104.78 618.35,104.78 ccw(c621,117) 623.65,104.78 636.19,104.78 v1(646.82,115.41)
  Bottom w3: v1(488.32,100.8) 472.82,116.3 472.82,173.82 529,230 529,366.89 552.39,390.28 J2.33
DCMI_D6: IC1.P$82 J2.24 | length 796.5
  Top w3: v1@621.44,90.82 IC1.P$82@633.37,102.75
  3-SIG w3: v1(621.23,89.82) 609.41,78 573,78 540.48,110.52 540.48,263.48 576,299 576,322.49 567,331.49 567,605.08 572.96,611.04 572.96,611.15 575,613.18 575,623.38 586.62,635 645.78,635 651.92,628.86 v1(653.68,628.86)
  Bottom w3: J2.24@650.62,570.31 650.62,622.83 653.68,625.88 v1(653.68,628.86)
DCMI_D7: IC1.P$91 J2.22 | length 919.1
  Top w3: v1(594.28,63.43) 607.78,76.93 IC1.P$91@607.78,77.16
  3-SIG w3: v1(594.28,63.43) 569.48,63.43 529,103.91 529,366 456,439 456,585 513,642 660.15,642 670.66,631.48 v1(671.49,631.48)
  Bottom w3: J2.22@671.23,568.63 671.49,568.89 v1(671.49,631.48)
DCMI_FSIN: IC1.P$63 J2.23 | length 345.6
  Top w3: v1(645.8,140.85) 646.1,140.85 658.96,153.7 IC1.P$63@658.96,153.93
  Bottom w3: v1(645.8,140.85) 646.1,140.85 660.7,155.45 660.7,176.7 665.88,181.88 686.88,181.88 689,184 689,216.6 689.33,216.93 689.33,229.67 658,261 658,349.94 650.82,357.13 J2.23
DCMI_HSYNC: IC1.P$64 J2.18 | length 569
  Top w3: v1(673.66,143.72) 674.34,143.72 IC1.P$64@684.55,153.93
  3-SIG w3: v1(673.66,143.72) 675.72,145.78 675.72,151.92 689.33,165.53 689.33,227.29 683.83,232.79 683.83,257.5 686.33,260 686.33,274.67 679.5,281.5 666.5,281.5 656.11,291.89 656.11,536.11 710,590 v1@710,612
  Bottom w6: J2.18 709.87,611.87 v1@710,612
  other v1: 710.31,613.97
DCMI_MISO: J1.15 J2.15 | length 28.9
  Bottom w10: J2.15 730.07,421.77 730.07,447.63 731.3,448.86 v1(731.3,449.4)
DCMI_MOSI: J1.17 J2.17
  other v1: 710.04,393.41
DCMI_PCLK: IC1.P$81 J2.14 | length 720.4
  Top w3: v1@600.21,90.13 601.36,91.28 601.36,96.33 IC1.P$81@607.78,102.75
  3-SIG w3: v1@694.5,91.5 711.97,108.97 711.97,122.49 714,124.51 714,146.92 708,152.92 708,236.82 709,237.82 709,369 728,388 728,414 714.87,427.13 714.87,457.87 726,469 726,525 749.35,548.35 v1@749.35,612.5
  4-SIG w3: v1(597,92) 613,76 682,76 v1(696,90)
  Bottom w6: J2.14 v1@749.24,612.38
  other v1: 749.66,614.47
DCMI_PWDN: IC1.P$43 J1.25 J2.25 Q1.1 | length 863.2
  Top w3: J1.25 631.2,448 v1(619.82,459.37) 643.51,483.06 ccw(c634,494) 644.94,484.49 658.52,498.07 711.83,498.07 732.83,477.07 782.94,477.07 810.88,505 839.8,505 885.03,459.77 885.03,425 920.03,390 965.03,390 985.03,370 985.03,362.95 Q1.1@1002.75,345.24 ; v1(646.73,195.5) 647.74,195.5 657.54,205.3 IC1.P$43
  Bottom w3: v1(619.82,459.37) 631.13,448.06 J2.25 631.13,366.91 650.4,347.64 650.4,291.4 647,288 647,258 660.78,244.22 660.78,200.22 656.45,195.89 647.12,195.89 v1(646.73,195.5)
DCMI_PWDN_INT: IC2.3 Q1.3 R5.1 | length 100.8
  Top w6: R5.1@929.72,360 Q1.3 971.19,356.12 971.19,342.68 983.76,330.11 IC2.3@983.76,308.46
  Top w10: IC2.3@983.76,308.46 986.64,305.59 IC2.3@987.43,305.59
DCMI_RST: J2.21 R6.2 | length 338.6
  4-SIG w3: v1(452.32,392.98) 530.34,392.98 v1(618.6,481.24)
  Bottom w3: v1(452.32,392.98) 453,392.31 453,352.3 R6.2@454.3,351 ; v1(618.6,481.24) 620.7,479.14 625.67,479.14 625.85,478.96 640.55,478.96 662.86,456.65 662.86,451.33 667.77,446.41 667.77,423.99 J2.21
DCMI_SCL: IC1.P$11 J2.32 | length 491.4
  Top w3: v1(555.5,297.2) 557.41,299.12 562.7,299.12 562.84,299.26 577.18,299.26 594.37,282.07 IC1.P$11
  3-SIG w3: v1(555.5,297.2) 555.12,297.2 548,304.32 548,374 510,412 510,591 530,611 530,617.84 538.16,626 555.68,626 562.5,619.18 v1(562.5,618.36)
  Bottom w6: v1(562.5,618.36) 563.32,618.36 572.08,609.61 J2.32
DCMI_SCLK: J1.13 J2.13
  other v1: 749.46,393.33
DCMI_SDA: IC1.P$23 J2.34 | length 494.1
  Top w3: v1(563,314) 577,314 596.06,294.94 613.24,294.94 619.27,288.91 619.27,278.92 628.19,270 645.03,270 IC1.P$23
  3-SIG w3: v1(545.34,612.93) 542.36,612.93 538.99,609.55 538.45,609.55 517,588.1 517,414.9 557,374.9 557,321.26 563,315.26 v1(563,314)
  Bottom w6: v1(545.34,612.93) 545.34,610.9 550.82,605.42 550.82,580.31 J2.34
DCMI_SSEL: J1.11 J2.11 | length 28.6
  Bottom w10: v1(768.82,449.78) 768.87,449.72 J2.11 J2.11
DCMI_VSYNC: IC1.P$72 J2.16 | length 1094.3
  Top w3: v1@621.44,116.41 IC1.P$72@633.37,128.34
  4-SIG w3: v1@621.23,115.41 633.8,127.98 666.3,127.98 667.82,129.5 681.5,129.5 v1(696,115) 865,115 989,239 989,545 901,633 739,633 731.31,625.31 v1(731.31,613.97)
  Bottom w6: J2.16 v1@729.56,610.56
  other v1: 621,117
FB: C12.2 IC3.6 R3.1 R4.1 | length 253.2
  Top w6: R4.1@499.81,230.96 464.65,266.13 464.65,343.65 470,349 IC3.6@518,349 ; R4.1@502.8,226.22 R3.1 C12.2@536.83,191.16 ; C12.2@536.83,179.16 C12.2@537.75,178.24
GND: C1.1 C2.1 C3.1 C4.1 C5.1 C6.1 C7.1 C8.1 C9.1 C10.1 C11.1 C13.1 C14.1 C15.1 C16.1 C17.1 C18.1 C19.1 C20.1 C21.1 C22.1 C23.1 C24.1 C25.1 C26.1 C27.1 C28.1 C29.1 IC1.P$1 IC1.P$19 IC1.P$20 IC1.P$22 IC1.P$29 IC1.P$30 IC1.P$32 IC1.P$39 IC1.P$40 IC1.P$44 IC1.P$45 IC1.P$46 IC1.P$48 IC1.P$49 IC1.P$55 IC1.P$56 IC1.P$57 IC1.P$61 IC1.P$69 IC1.P$100 IC2.2 IC3.2 J1.5 J1.19 J1.27 J2.5 J2.19 J2.27 R4.2 R5.2 | length 1120.9
  Top w3: R4.2 R4.2@537.88,229.83 ; v1(597.84,143.77) IC1.P$61@607.78,153.7 ; v1(602.5,319) 604.6,316.9 604.6,312.81 605.68,311.73 605.68,309.35 IC1.P$1 ; IC1.P$22 632.96,256.43 645.26,244.12 v1(645.26,242.06) ; IC1.P$32@633.37,230.71 v1@645.84,243.19 ; v1(675.07,195.5) 675.07,195.87 684.1,204.89 IC1.P$44@684.55,204.89 ; IC1.P$55 721.37,191.35 v1(722.41,191.35) ; IC1.P$45 709.73,204.03 v1(722.41,191.35) ; v1@749.98,188.98 749.98,182.71 ; v1(750,190.5) 747.9,192.6 741.4,192.6 736.37,197.63 736.37,204.26 IC1.P$46 722.41,192.38 v1(722.41,191.35) ; IC1.P$57 759.87,180.75 751.95,180.75 749.98,182.71 ; v1(774.76,215) 775.78,215 785.49,205.3 788.65,205.3 793.48,210.13 797.92,210.13 v1(800.02,212.24) ; v1(800.02,212.24) v1(800.02,212.24) ; v1(800.93,141.82) 800.93,142.95 IC1.P$69 ; IC1.P$49 809.71,205.3 802.83,212.18 v1(800.02,212.24) ; IC1.P$39 823.89,242.68 v1(825.94,242.68) IC1.P$29 v1(825.47,269.89) 825.47,268.7 IC1.P$30 ; IC1.P$19 824.28,269.89 v1(825.47,269.89) ; v1(825.47,269.89) IC1.P$20 ; v1@825.94,242.64 IC1.P$40 ; IC1.P$100 v1(849.63,64.27) ; v1(722.41,191.35) 734.06,179.7 746.97,179.7 749.98,182.71
  Top w6: R4.2@537.88,229.83 v1(555.5,229.83) ; v1(611.45,388.97) 611.47,400.31 611.47,400.92 J1.27 ; v1(814.41,359.72) 828.05,373.36 J1.5
  Top w8: C14.1 958.72,211 C15.1
  Top w10: IC3.2 448.54,315 v4(448.54,316.04) ; C15.1@948.7,213.32 955.43,220.05 v3(955.43,279.47) 955.96,280 IC2.2@987.43,280
  Top w16: C17.1@487.53,70.44 C17.1@497.53,60.44
  Bottom w3: C10.1 C10.1@629.33,169.22 ; C8.1 629.46,169.35 C10.1@629.33,169.22 ; C8.1@629.58,192.73 C8.1@630.44,193.59 ; v1@644.56,170.41 642.94,170.41 641.74,169.22 C10.1@629.33,169.22 ; C7.1 726.69,99.94 734.56,92.06 ; v1(800.02,212.24) 803,212.24 805.91,209.32 811.71,209.32 C2.1 C9.1 C5.1 816.03,154.04 812.1,150.12 811.83,150.12 810.72,149 810.03,149 802.85,141.82 v1(800.93,141.82) 800.93,141.73 808.23,134.43 811.64,134.43 C13.1 ; 802.12,463.82 822.56,443.38 823.29,443.38 J2.5@827.98,438.69 ; C1.1 824.82,279.68 824.82,270.53 v1(825.47,269.89) ; v1@825.24,269.89 v1(825.47,269.89) ; J2.5 J2.5@827.98,438.69 ; 840,455.29 840,452.3 831.99,444.29 831.99,444.06 827.98,440.05 J2.5@827.98,438.69 ; C21.1 844.37,268.96 841.46,268.96 840.77,268.27 827.08,268.27 v1(825.47,269.89)
  Bottom w6: J2.27@611.32,421.39 J2.27 v1(611.45,388.97) ; J2.5 J2.5@830.24,423.52
  Bottom w10: C26.1 853.1,355.24 900.75,355.24 C27.1
  other v1: 800,91 646,168 696,321 955,335 690.45,447.67
  other v2: 522.37,35.93 708,39 813,40 554,50 406,105 967.05,154.31 865,194 373,315 874.74,362.15 430,405 950,411 634,494 879,501
  other v5: 995.03,610
RESET_N: IC1.P$54 IC3.5 R6.1 | length 713.5
  Top w3: v1(674.61,169.36) IC1.P$54@684.55,179.29
  Top w6: v1(478.27,376.22) 479.05,377 539.47,377 552,364.47 552,325 547.36,320.36 526.57,320.36 IC3.5
  4-SIG w3: v1(478.27,376.22) 435.22,376.22 401,342 401,208 426.48,182.52 661.45,182.52 v1(674.61,169.36)
  Bottom w6: v1(478.27,376.22) 487.73,366.76 487.73,354.97 R6.1@491.7,351
SENSOR_CLK: IC1.P$13 J1.12 | length 551
  Top w3: v1(619.16,340.82) 620,339.98 620,302 625.75,296.25 633.48,296.25 636.59,293.15 639.4,293.15 648,284.55 652.39,284.55 653.18,283.76 656.86,283.76 IC1.P$13 ; J1.12@766,576.03 J1.12 768.99,613.99 v1(769.35,614.34)
  3-SIG w3: v1(619.16,340.82) 598,361.98 598,496 672.34,570.34 672.34,614.66 688.06,630.37 756.22,630.37 769.35,617.24 v1(769.35,614.34) v1@769.43,614.26
SENSOR_D0: IC1.P$4 J1.3 | length 442.4
  Top w3: v1(670.5,320.26) 672.12,320.26 684.14,308.23 IC1.P$4 ; 700.47,471.38 708.63,463.22 709.51,462.34 788.02,462.34 816.68,491 834,491 847.73,477.27 J1.3
  3-SIG w3: v1(670.5,320.26) 663.6,327.14 663.6,479.6 667,483 689.65,483 694.56,478.09 v1(696.91,478.09)
SENSOR_D1: IC1.P$15 J1.1 | length 498.1
  Top w3: v1(684.8,464.76) 684.8,464.95 678.47,471.29 678.47,486.52 679.34,487.4 680.22,488.28 689.68,488.28 cw(c696.91,478.09) 704.14,488.28 711.72,488.28 730.66,469.34 785.12,469.34 813.78,498 836.9,498 854.73,480.17 854.73,470.27 867.42,457.58 J1.1 ; v1(696.5,294) 697.8,294 IC1.P$15
  3-SIG w3: v1(684.8,464.76) 683.76,464.76 672.33,453.33 672.33,336.11 683.15,325.29 683.15,316.7 ccw(c695.64,316.32) 683.15,315.93 683.15,307.35 v1(696.5,294)
SENSOR_D2: IC1.P$36 J1.9 | length 617.5
  Top w3: v1@723.4,218.96 IC1.P$36 ; J1.9 788.68,448.17 813.09,472.59 817.83,472.59 818.46,473.21 822.98,473.21 v1(825.09,475.32)
  3-SIG w3: v1(723.19,217.96) 736.07,205.08 736.07,177.08 786.15,127 806,127 814,135 814,162 834.63,182.63 834.63,212.63 859.13,237.13 859.13,283.75 840,302.88 840,469 834.52,474.48 825.92,474.48 v1(825.09,475.32)
SENSOR_D3: IC1.P$26 J1.7 | length 575.1
  Top w3: v1(723.03,242.49) 723.03,244.18 IC1.P$26 ; J1.7 808.36,453.17 814.1,458.91 826.07,458.91 v1(827.5,457.48)
  3-SIG w3: v1(827.5,457.48) v1@828.99,455.99
  4-SIG w3: v1(723.03,242.49) 740.27,225.25 747.55,225.25 cw(c753,214) 758.45,225.25 767.6,225.25 cw(c774.76,215) 781.92,225.25 930.25,225.25 942,237 942,247 839,350 839,434 827.5,445.5 v1(827.5,457.48)
SENSOR_D4: IC1.P$16 J1.31 | length 327.8
  Top w3: J1.31 574.74,418.94 574.74,396.26 603,368 655.1,368 675.1,348 707.87,348 724.63,364.77 v1(726.64,364.77) ; v1@724.63,271.37 IC1.P$16
  4-SIG w3: v1(724,272) 709,287 709,349.19 724.57,364.77 v1(726.64,364.77)
SENSOR_D5: IC1.P$6 J1.29 | length 315.6
  Top w3: J1.29 591.83,389.17 606,375 658,375 678,355 704.97,355 706.87,356.9 706.87,362.78 717.99,373.91 718.11,373.91 724.2,380 734.1,380 769,345.1 769,332 766,329 751.68,329 751.18,328.5 749.17,328.5 749,328.33 744.33,328.33 735.33,319.33 IC1.P$6
SENSOR_D6: IC1.P$47 J1.35 | length 443.2
  Top w3: J1.35@532.71,429.13 532.71,402.81 536.78,398.74 536.78,398.22 581,354 649.3,354 669.3,334 728.25,334 ccw(c728.25,346.5) 736.37,337 v1@748,337 ; v1@748.99,217.23 IC1.P$47
  3-SIG w3: v1@747.99,217.44 737.79,227.63 737,228.43 ccw(c730,228.44) 736.77,230.22 736.77,279.46 739.02,281.71 753.17,281.71 763.08,291.62 cw(c796.58,291.85) 764.36,301.02 764.36,329.1 757.36,336.1 748.9,336.1 v1@748,337
  other v1: 753,214 746,341
SENSOR_D7: IC1.P$37 J1.28 | length 494.8
  Top w3: J1.28 614,576.53 614,553.63 662.56,505.07 714.73,505.07 734.92,484.88 763.43,484.88 768.12,489.57 v1(770.68,489.57) ; v1(749.5,242.69) 749.5,242.31 IC1.P$37
  3-SIG w3: v1(749.5,242.69) 749.5,244.54 772,267.04 778.05,273.09 cw(c797.41,270.77) 778.66,276.13 778.66,284.14 cw(c796.58,291.85) 778.56,299.3 778.56,377.88 778.66,377.99 778.66,434.8 781.32,437.46 781.32,478.92 v1(770.68,489.57)
SENSOR_D8: IC1.P$27 J1.26 | length 452.4
  Top w3: J1.26 631.2,550.8 669.93,512.07 717.87,512.07 731.51,498.43 751.13,498.43 754.52,501.82 v1(757.5,501.82) ; v1@748.99,268.41 IC1.P$27
  3-SIG w3: v1@747.99,268.62 759.74,268.62 771.66,280.54 771.66,282.81 cw(c796.58,291.85) 771.56,300.58 771.56,380.78 771.66,380.89 771.66,418.34 755.35,434.65 755.35,494.56 755.4,494.61 755.4,499.72 v1(757.5,501.82)
  other v1: 750.1,268.65
SENSOR_D9: IC1.P$17 J1.33 | length 308.1
  Top w3: J1.33@552.39,421.54 J1.33@552.39,429.13 ; J1.33 555.69,418.3 555.69,398.31 593,361 652.2,361 672.2,341 720.99,341 726.49,346.5 v1(728.25,346.5) ; v1@748.99,294 IC1.P$17
  3-SIG w3: v1(728.25,346.5) 728.25,313.95 v1(747.99,294.21)
SENSOR_D10: IC1.P$7 J1.24 | length 384.5
  Top w3: J1.24@650.88,559.66 652.87,557.67 652.87,541.04 673.82,520.09 732.2,520.09 737.61,514.69 v1(739.46,514.69) ; v1@752.59,315.99 IC1.P$7
  4-SIG w3: v1(739.46,514.69) 765.31,514.69 796,484 796,364.63 v1@748.5,317.13
  other v1: 750.67,315.83
SENSOR_D11: IC1.P$18 J1.22 | length 414.9
  Top w3: J1.22 673.8,575.78 673.8,537.06 683.59,527.28 745.14,527.28 756.62,515.8 780.68,515.8 v1@788.67,507.81 ; IC1.P$18 796.29,291.85 v1(796.58,291.85)
  3-SIG w3: v1@788.67,507.81 788.67,505.91 v1@791.06,503.52 ; v1@792.46,504.92 805.22,492.16 805.22,394.47 792.89,382.14 792.89,372.41 792.56,372.08 792.56,303.64 792.89,303.32 792.89,298.52 796.58,294.82 v1(796.58,291.85)
  other v1: 794.23,506.36
SENSOR_D12: J1.8
SENSOR_FSIN: IC1.P$25 J1.23 | length 306.2
  Top w3: v1(640.56,459.7) 650.94,449.32 650.94,421.6 J1.23 ; v1(671.63,267.86) 673.05,269.28 696.93,269.28 IC1.P$25
  3-SIG w3: v1(640.56,459.7) 633,452.14 633,356 648.7,340.3 648.7,335.95 cw(c636.23,335.1) 648.7,334.24 648.7,319.8 cw(c636.49,317.1) 648.7,314.39 648.7,276.36 657.46,267.6 671.38,267.6 v1(671.63,267.86)
SENSOR_HSYNC: IC1.P$8 J1.18 | length 359
  Top w3: v1(687.42,385.06) 689.29,383.19 695.81,383.19 698.09,380.91 715.21,380.91 721.3,387 737,387 786.51,337.49 IC1.P$8 ; J1.18 711.43,577.53 v1(711.44,542.49)
  3-SIG w3: v1@685.5,385.06 685.5,416.5 706,437 706,468.8 711.44,474.24 v1(711.44,542.49)
SENSOR_PCLK: IC1.P$28 J1.14 | length 402.2
  Top w3: J1.14 749.31,543.24 762.64,529.91 786.37,529.91 788.97,527.3 cw(c788.67,507.81) 790.14,527.25 cw(c790.03,524.25) 790.34,527.24 804.96,527.24 809.34,531.62 v1(812.22,531.62) ; IC1.P$28 797.45,267.42 v1(799.21,267.42)
  3-SIG w3: v1(799.21,267.42) 799.89,267.42 809.08,276.61 809.08,297.03 799.56,306.54 799.56,369.18 812.22,381.85 v1(812.22,531.62)
SENSOR_RST: IC1.P$35 J1.21 | length 226.4
  Top w3: J1.21 670.57,375.62 678.23,367.96 v1(694.37,367.96) ; v1(696.5,243) 708.61,230.89 IC1.P$35
  Bottom w3: v1(694.37,367.96) 683.04,356.63 683.04,296.96 cw(c670.7,294.98) 683.04,293 683.04,282.96 696.5,269.5 v1(696.5,243)
SENSOR_SCL: IC1.P$14 J1.32 R1.1 | length 911.2
  Top w3: v1(404.9,567.78) 404.78,567.78 392,555 392,543 401,534 414.94,534 466.94,586 503,586 508.98,580.02 508.98,528.66 516.64,521 543.46,521 572.08,549.62 J1.32@572.08,570.87 ; v1(670.7,294.98) 671.23,294.98 IC1.P$14
  3-SIG w3: v1(404.9,567.78) 406.22,567.78 418,556 418,542 401,525 401,379 417,363 466,363 487.66,341.34 ; v1(478.67,309.7) 480.54,311.58 487.06,311.58 494,318.52 494,335 493.27,335.73 487.71,341.34
  4-SIG w3: v1(478.67,309.7) 500.3,309.7 525.3,284.7 560.68,284.7 568.27,292.3 582.81,292.3 592.11,283 665,283 668.71,286.71 668.71,292.99 v1(670.7,294.98)
SENSOR_SDA: IC1.P$3 J1.34 R2.1 | length 780.7
  Top w3: v1(405,547.85) 457.15,600 505,600 518.77,586.23 518.77,540 528.67,530.09 541.45,530.09 552.39,541.03 J1.34@552.39,570.87 ; v1(636.23,335.1) 637.15,334.17 645.56,334.17 650.76,328.98 650.76,315.45 IC1.P$3
  3-SIG w3: v1(405,547.85) 392,534.85 392,376.37 413.37,355 460.61,355 476.54,339.07 476.54,334.1 v1(478.65,331.99)
  4-SIG w3: v1(478.65,331.99) 479.06,331.58 513.58,331.58 540,358 635,358 641,352 641,342.62 636.23,337.85 v1(636.23,335.1)
SENSOR_VSYNC: IC1.P$10 J1.16 | length 418.2
  Top w3: J1.16 732.64,576 732.64,554.15 742.31,544.48 742.31,540.01 759.41,522.91 783.47,522.91 786.13,520.25 787.37,520.25 788.31,519.31 793.8,519.31 794,519.12 819.31,519.12 828.27,528.07 828.27,540.91 v1(829.42,542.06) ; IC1.P$10 837.77,307.74 v1(852.82,307.74)
  3-SIG w3: v1(829.42,542.06) 827.32,539.96 827.32,534.86 827.27,534.81 827.27,527.08 827,526.8 827,504 852.82,478.18 v1(852.82,307.74)
SENSOS_D13: J1.6
SW: IC3.3 L1.2 | length 72.3
  Top w10: L1.2@412,214 418.85,220.85 IC3.3
  Top w16: L1.2 L1.2@432.75,208.8
VCC: C15.2 C16.2 IC2.1 IC3.4 J1.2 J1.10 J1.20 J1.30 J1.36 J2.2 J2.10 J2.20 J2.30 J2.36 L2.2 L3.2 Q1.2 R1.2 R2.2 | length 3211.4
  Top w8: v2(466.03,618.29) 512.34,618.29 ; J1.36 532.77,597.13 531.26,598.64 529.56,598.64 517.02,611.17 517.02,613.61 512.34,618.29 ; J1.30 591.83,623.17 580,635 529.05,635 512.34,618.29
  Top w10: v2(689.79,610.33) 689.79,625.25 699.17,634.63 791.76,634.63 797.62,628.77 797.62,611.6 789.19,603.17 789.19,579.53 J1.10 ; J1.2 867.42,586.56 867.93,587.07 985.68,587.07 1002.75,570 1002.75,374.76 1020.24,374.76 1035.03,359.97 1035.03,274.03 1016.79,255.79 990.78,255.79 IC2.1 996.58,254.41 999.46,251.53 C15.2@999.46,207.1
  Top w16: IC3.4@519.24,277.6 IC3.4 576.6,277.6 v2(576.8,277.8) v2@577,278
  3-SIG w6: v2(466.03,618.29) 441.49,593.75 441.49,437.19 502.8,375.88 502.8,270.51 503.7,269.61 503.7,263.3 v2(506,261)
  Bottom w3: R2.2 429,520.27 429,594.73 R1.2 465.62,618.7 v2(466.03,618.29) ; J2.36 J2.36@532.92,578.96
  Bottom w6: C16.2 483.03,250.9 495.9,250.9 v2(506,261)
  Bottom w8: v2(466.03,618.29) 493.59,618.29 519.88,592 531.19,592 532.92,590.27 J2.36@532.92,578.96 ; L2.2 576,277 v2(576.8,277.8) ; J2.2 867.35,589.49 868.86,591 954,591 972,573 972,431 1035.59,367.41 1035.59,295.58 1001,260.99 1001,62 986,47 L3.2
  Bottom w10: v2(466.03,618.29) 485.46,637.72 573.28,637.72 591.76,619.24 J2.30 591.76,526.4 597.62,520.54 661.73,520.54 689.25,548.06 690.05,548.06 690.12,548.13 690.12,578.67 J2.20 v2@690.19,610.33 ; v2(689.79,610.33) 691.32,611.86 691.32,626.43 697.84,632.95 781.51,632.95 796.08,618.39 801.87,618.39 ; J2.10 789.12,579.25 789.12,605.64 801.87,618.39 ; J2.2@867.35,589.49 v2@867.35,608 ; v2@867.35,609.65 858.61,618.39 801.87,618.39
  other v2: 788.84,548.42 868,549 535,550 868,608
VDD: C6.2 C7.2 C8.2 C9.2 C23.2 C29.2 IC1.P$5 IC1.P$41 IC1.P$60 IC1.P$95 L7.1 | length 837.8
  Top w3: v1(596.51,195.97) 597.27,195.97 606.42,205.12 IC1.P$41@607.78,205.12 ; IC1.P$5 711.29,307.66 v1(722.87,296.08)
  3-SIG w3: v1(704,69) 722.53,87.53 v1@722.53,173.86
  4-SIG w3: v2(475.68,213.14) 573.16,213.14 588.28,198.01 594.47,198.01 v1(596.51,195.97)
  4-SIG w4: v1(596.51,195.97) 613.54,213 661,213 665.5,208.5 686.87,208.5 721.51,173.86 722.53,173.86 738.4,158 774,158 789,173 839.9,173 846.69,179.79 v1(847.25,179.79)
  Bottom w3: C6.2@710.03,306.5 717.19,306.5 719.07,304.61 719.07,302.85 722.87,299.05 v1(722.87,296.08)
  Bottom w4: C6.2@710.03,306.5 710.03,197.35 709.41,196.73 709.41,185.96 721.51,173.86 v1@722.53,173.86
  Bottom w8: C29.2@444,197 444,206.64 450.49,213.14 v2(475.68,213.14)
  Bottom w12: C23.2 L7.1 C29.2@444,197
  other v1: 723,168
VDD_PHY: C11.2 C21.2 C27.2 IC1.P$38 L5.1 | length 235.5
  Top w3: v1@774.76,242.64 IC1.P$38
  Bottom w3: C11.2 788.68,242.68 v1(774.76,242.68) 776.46,240.98 776.46,234.12 784.64,225.95 835.6,225.95 C21.2
  Bottom w6: C21.2 872.4,223 L5.1 892.87,268.87 C27.2@903.04,279.04
VDD_PLL: C5.2 C22.2 C28.2 IC1.P$70 L6.1 | length 151.7
  Top w5: IC1.P$70 IC1.P$70@837.69,157.66
  Bottom w6: C5.2 C22.2 ; L6.1 C22.2 ; C28.2 893.87,105.66 C22.2
  other v1: 847,154
VDD_REG: C12.1 C17.2 L1.1 L6.2 L7.2 R3.2 | length 858.1
  Top w6: L1.1 436.57,154.19 502.36,154.19 R3.2 ; R3.2@506.04,157 C12.1@546,157
  Top w10: C17.2@423.75,50.48 C17.2@423.75,57.53 ; C17.2@426.87,70.14 C17.2@432.25,64.76 ; C17.2@442,38 463.8,16.2 875.2,16.2 910.27,51.27 910.27,138.27 v2(952,180)
  Top w16: C17.2@423.75,57.53 C17.2@426.67,60.44 ; 428.62,90.38 L1.1
  Bottom w6: L6.2 934.73,183.4 945.36,183.4 948.75,180 v2(952,180)
  other v2: 442,106
VDDA: J1.4 J2.4 | length 66
  Top w3: v1(847.58,545.99) 847.58,579.02 J1.4
  Bottom w3: v1(847.58,545.99) 847.58,578.74 J2.4
VDDIO_H: C2.2 C3.2 C4.2 C13.2 C19.2 C25.2 IC1.P$2 IC1.P$34 IC1.P$50 IC1.P$68 IC1.P$80 IC1.P$92 L3.1 | length 986.2
  Top w3: v1@623.88,68.55 632.67,77.34 IC1.P$92
  3-SIG w3: v1(621.77,62.99) 637.74,47.03 650.25,47.03 659.82,56.59 659.82,201.66 669.86,211.7 669.86,214.77 676.83,221.73 v1(676.83,222.11) 676.83,232.15 636.49,272.49 v1(636.49,317.1)
  3-SIG w6: v1(847,129) 886,168 886,207 878,215 856.62,215 v1(847.13,205.51)
  4-SIG w3: v1(676.83,222.11) 691.89,222.11 709,205 726.43,205 734,197.43 734,197 737,194 737,182 744,175 780.39,175 785.89,180.5 822.12,180.5 v1(847.13,205.51)
  4-SIG w6: v1(794.73,159.23) 816.77,159.23 v1(847,129)
  Bottom w3: C3.2 618,56.24 621.77,60.02 v1(621.77,62.99) ; C4.2 628.57,305.57 628.57,309.18 v1(636.49,317.1) ; C25.2@762,125.46 762.96,125.46 782.21,144.72 C19.2
  Bottom w6: v1(847,129) 864,112 864,68 885,47 L3.1
VDDIO_OTPM: C10.2 C18.2 C24.2 IC1.P$51 L2.1 | length 150.8
  Top w3: v1(595.32,170.02) 596.47,171.17 599.43,171.17 IC1.P$51@607.78,179.52
  Bottom w8: C24.2@561,169.46 561.49,168.97 593.73,168.97 594.78,170.02 v1(595.32,170.02) 595.7,169.64 606.42,169.64 C10.2 ; L2.1 582.28,218.16 591.03,218.16 C18.2@605.87,233
  Bottom w12: C24.2@561,169.46 575.05,183.52 575.05,210.93 L2.1
VDDIO_REG: C14.2 IC2.5 IC3.1 L4.2 L5.2 | length 693.7
  Top w5: v1(418.81,338.08) 418.81,351.97 IC3.1@419.3,352.46
  Top w6: C14.2 890.87,246.44 896.41,251.97 IC2.5@896.41,254.57
  Top w10: IC2.5@910.03,251.81 IC2.5@912.63,254.41
  4-SIG w3: 687.13,254.13 690.82,254.13 cw(c696.5,243) 702.18,254.13 718.49,254.13 cw(c723.03,242.49) 727.56,254.13 744.48,254.13 cw(c749.5,242.69) 754.52,254.13 769.75,254.13 cw(c774.76,242.68) 779.77,254.13 820.93,254.13 cw(c825.94,242.68) 830.95,254.13 911.87,254.13 v2(925,241)
  4-SIG w4: 538,256 651,256 660,247 680,247 687.13,254.13
  4-SIG w6: v1@419,338.08 419,307 443,283 511,283 538,256
  Bottom w6: L5.2 932.13,218 943.42,218 951.52,209.9 977.97,209.9 L4.2
VDDIO_S: C1.2 C20.2 C26.2 IC1.P$9 L4.1 | length 468
  Bottom w3: C26.2 779.39,345.61 798.64,326.36 801.49,326.36 810.85,316.99 v1(812.09,316.99) 814.19,314.89 814.19,311.63 820.49,305.33 C1.2
  Bottom w6: C26.2 779.39,351.85 797.72,370.18 801.11,370.18 819.93,389 990,389 1011,368 1011,300 995.9,284.9 983.03,284.9 C20.2 L4.1
pads on no net: FD1.1 FD2.1 FD3.1 FD4.1 FD5.1 FD6.1 FD7.1 FD8.1 IC1.P$12 IC1.P$21 IC1.P$24 IC1.P$31 IC1.P$33 IC1.P$42 IC1.P$52 IC1.P$53 IC1.P$59 IC1.P$62 IC1.P$66 IC1.P$67 IC1.P$71 IC1.P$75 IC1.P$76 IC1.P$77 IC1.P$78 IC1.P$79 IC1.P$85 IC1.P$86 IC1.P$87 IC1.P$88 IC1.P$89 IC1.P$90 IC1.P$94 IC1.P$96 IC1.P$97 IC1.P$98 IC1.P$99 IC2.4 J1.0 J1.MH1 J1.MH2 J2.0 J2.1 J2.3 J2.6 J2.7 J2.8 J2.9 J2.MH1 J2.MH2 M1.1 M2.1

## Polygon pours and split planes (outlines as drawn)
GND on 5-GND "GND_L05_P003" (solid, remove dead copper, pour order 3): 0,0 0,651 1402,651 1402,0
GND on 2-GND "GND_L02_P004" (solid, remove dead copper, pour order 4): 0,0 0,651 1402,651 1402,0
GND on Bottom "GND_L06_P002" (solid, remove dead copper, pour order 2): 0,0 0,651 1402,651 1402,0

## Keep-outs
Keep-Out Layer:
  the board outline again, w5

## Silkscreen, mask and mechanical layers (free items; w line width, h text height)
Top Overlay:
  drawing of 264 lines, arcs and shapes, not listed
  text "AP0202" at 1040.03,361 h27.2
  text "7/9/23" at 580.03,345 h27.2
  text "ISP" at 1040.03,313 h27.2
  text "OpenMV" at 215,272 h26.35
  text "R1" at 1040.03,265 h27.2
  text "https://openmv.io" at 554.43,16.12 h27.2
Dimension:
  lines w3.94: 1501.48,-113.81 1607.63,-113.81 1812.89,-113.81 1964.38,-113.81 ; 1501.48,-63.07 1607.63,-63.07 1812.89,-63.07 1964.38,-63.07 ; 1501.48,-12.33 1607.63,-12.33 1812.89,-12.33 1964.38,-12.33 ; 1501.48,38.4 1607.63,38.4 1812.89,38.4 1964.38,38.4 ; 1501.48,89.14 1607.63,89.14 1812.89,89.14 1964.38,89.14 ; 1501.48,139.88 1607.63,139.88 1812.89,139.88 1964.38,139.88 ; 1501.48,190.62 1607.63,190.62 1812.89,190.62 1964.38,190.62 ; 1501.48,241.36 1607.63,241.36 1812.89,241.36 1964.38,241.36 ; 1501.48,292.1 1607.63,292.1 1812.89,292.1 1964.38,292.1 ; 1501.48,342.84 1607.63,342.84 1812.89,342.84 1964.38,342.84 ; 1501.48,393.58 1607.63,393.58 1812.89,393.58 1964.38,393.58 ; 1501.48,444.32 1607.63,444.32 1812.89,444.32 1964.38,444.32 ; 1501.48,495.06 1607.63,495.06 1812.89,495.06 1964.38,495.06 ; 1501.48,545.8 1607.63,545.8 1812.89,545.8 1964.38,545.8 ; 1501.48,596.54 1964.38,596.54 ; 1607.63,647.28 1607.63,-164.55 ; 1812.89,647.28 1812.89,-164.55 ; 1607.63,-164.55 1501.48,-164.55 1501.48,647.28 1964.38,647.28 1964.38,-164.55 1812.89,-164.55 ; 1607.63,-164.55 1812.89,-164.55
  text "OpenMV ISP-AP0202" at 641.58,656.2 h80
  text "Layer" at 1526.85,609.22 h25.37
  text "Name" at 1633,609.22 h25.37
  text "Thickness" at 1838.26,609.22 h25.37
  text "Top Overlay" at 1633,558.48 h25.37
  text "Top Solder" at 1633,507.74 h25.37
  text "0.010mm" at 1838.26,507.74 h25.37
  text "1" at 1526.85,457 h25.37
  text "Top" at 1633,457 h25.37
  text "0.035mm" at 1838.26,457 h25.37
  text "Dielectric 2" at 1633,406.26 h25.37
  text "0.127mm" at 1838.26,406.26 h25.37
  text "2" at 1526.82,355.52 h25.37
  text "2-GND" at 1632.97,355.52 h25.37
  text "0.035mm" at 1838.26,355.52 h25.37
  text "Dielectric 3" at 1633,304.79 h25.37
  text "0.254mm" at 1838.26,304.79 h25.37
  text "3" at 1526.85,254.05 h25.37
  text "3-SIG" at 1633,254.05 h25.37
  text "0.035mm" at 1838.26,254.05 h25.37
  text "Dielectric 1" at 1633,203.31 h25.37
  text "0.200mm" at 1838.26,203.31 h25.37
  text "4" at 1526.85,152.57 h25.37
  text "4-SIG" at 1633,152.57 h25.37
  text "0.035mm" at 1838.26,152.57 h25.37
  text "Dielectric 4" at 1633,101.83 h25.37
  text "0.254mm" at 1838.26,101.83 h25.37
  text "5" at 1526.85,51.09 h25.37
  text "5-GND" at 1633,51.09 h25.37
  text "0.035mm" at 1838.26,51.09 h25.37
  text "TG-170 or equivalent substrate  / Er = 4.3-4.5 @ 1MHz / +/- 10% /  / double side solder mask red / double side silkscreen white /  / 3 mil min trace width and / 3 mil min isolation /  / RoHS required" at 2057,7.11 h30
  text "Dielectric 5" at 1633,0.35 h25.37
  text "0.127mm" at 1838.26,0.35 h25.37
  text "6" at 1526.85,-50.39 h25.37
  text "Bottom" at 1633,-50.39 h25.37
  text "0.035mm" at 1838.26,-50.39 h25.37
  text "Bottom Solder" at 1633,-101.13 h25.37
  text "0.010mm" at 1838.26,-101.13 h25.37
  text "Bottom Overlay" at 1633,-151.87 h25.37